# Altium PCB ActiveMarkerDeck.PcbDoc
Units mm, origin at the board's own origin, x right, y up, seen from the top; angles counter-clockwise.
Board outline 64 x 64 mm, 2 copper layers (F.Cu, B.Cu); 22 components, 12 nets, 118 pads, 6 vias.
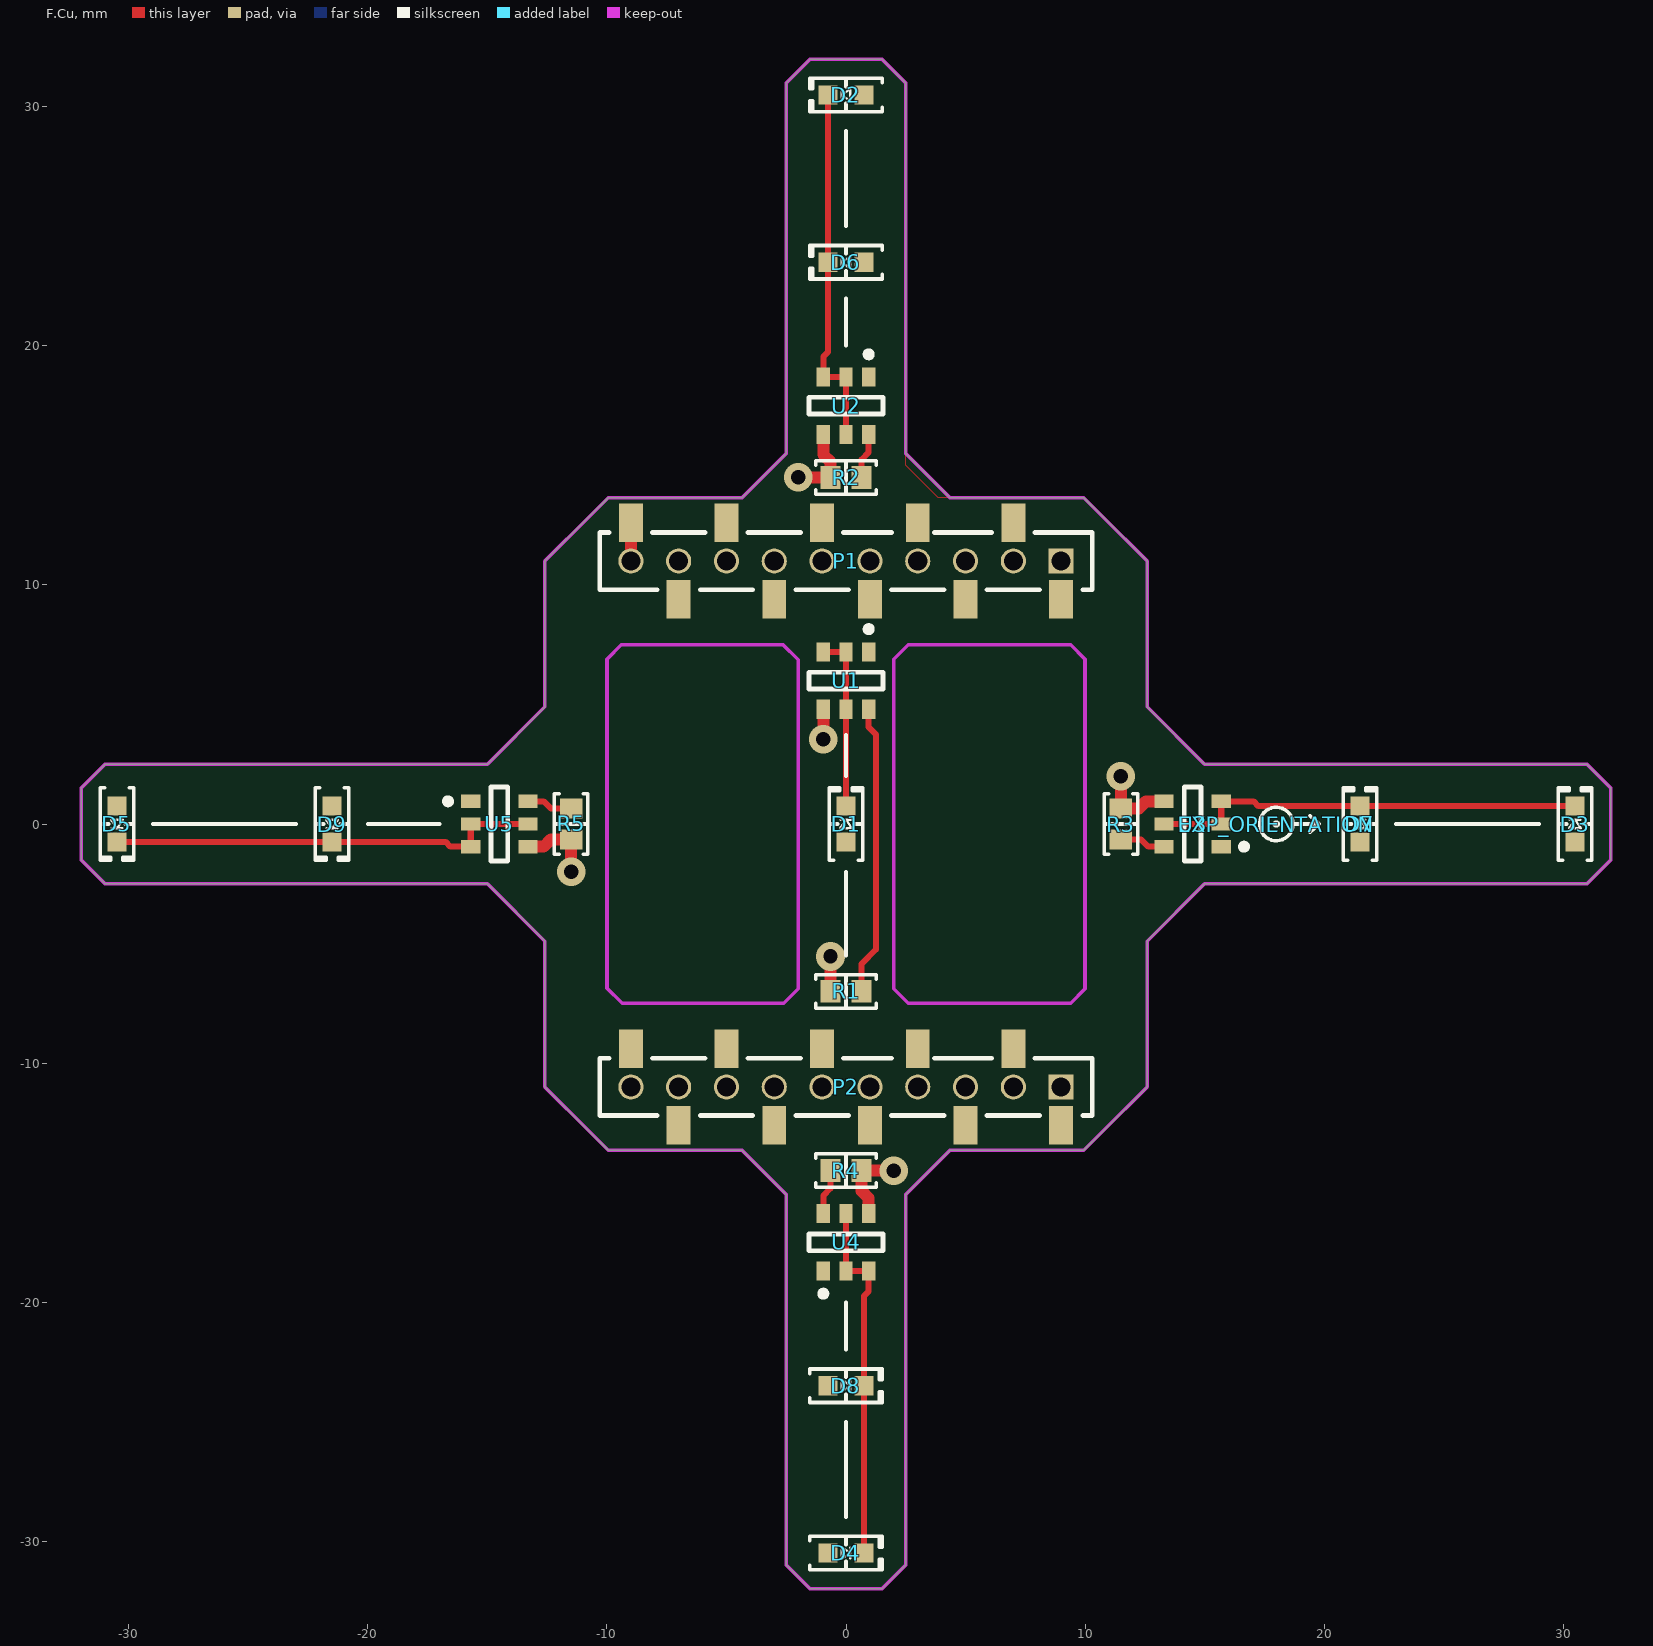
[diagram p0: F.Cu view]
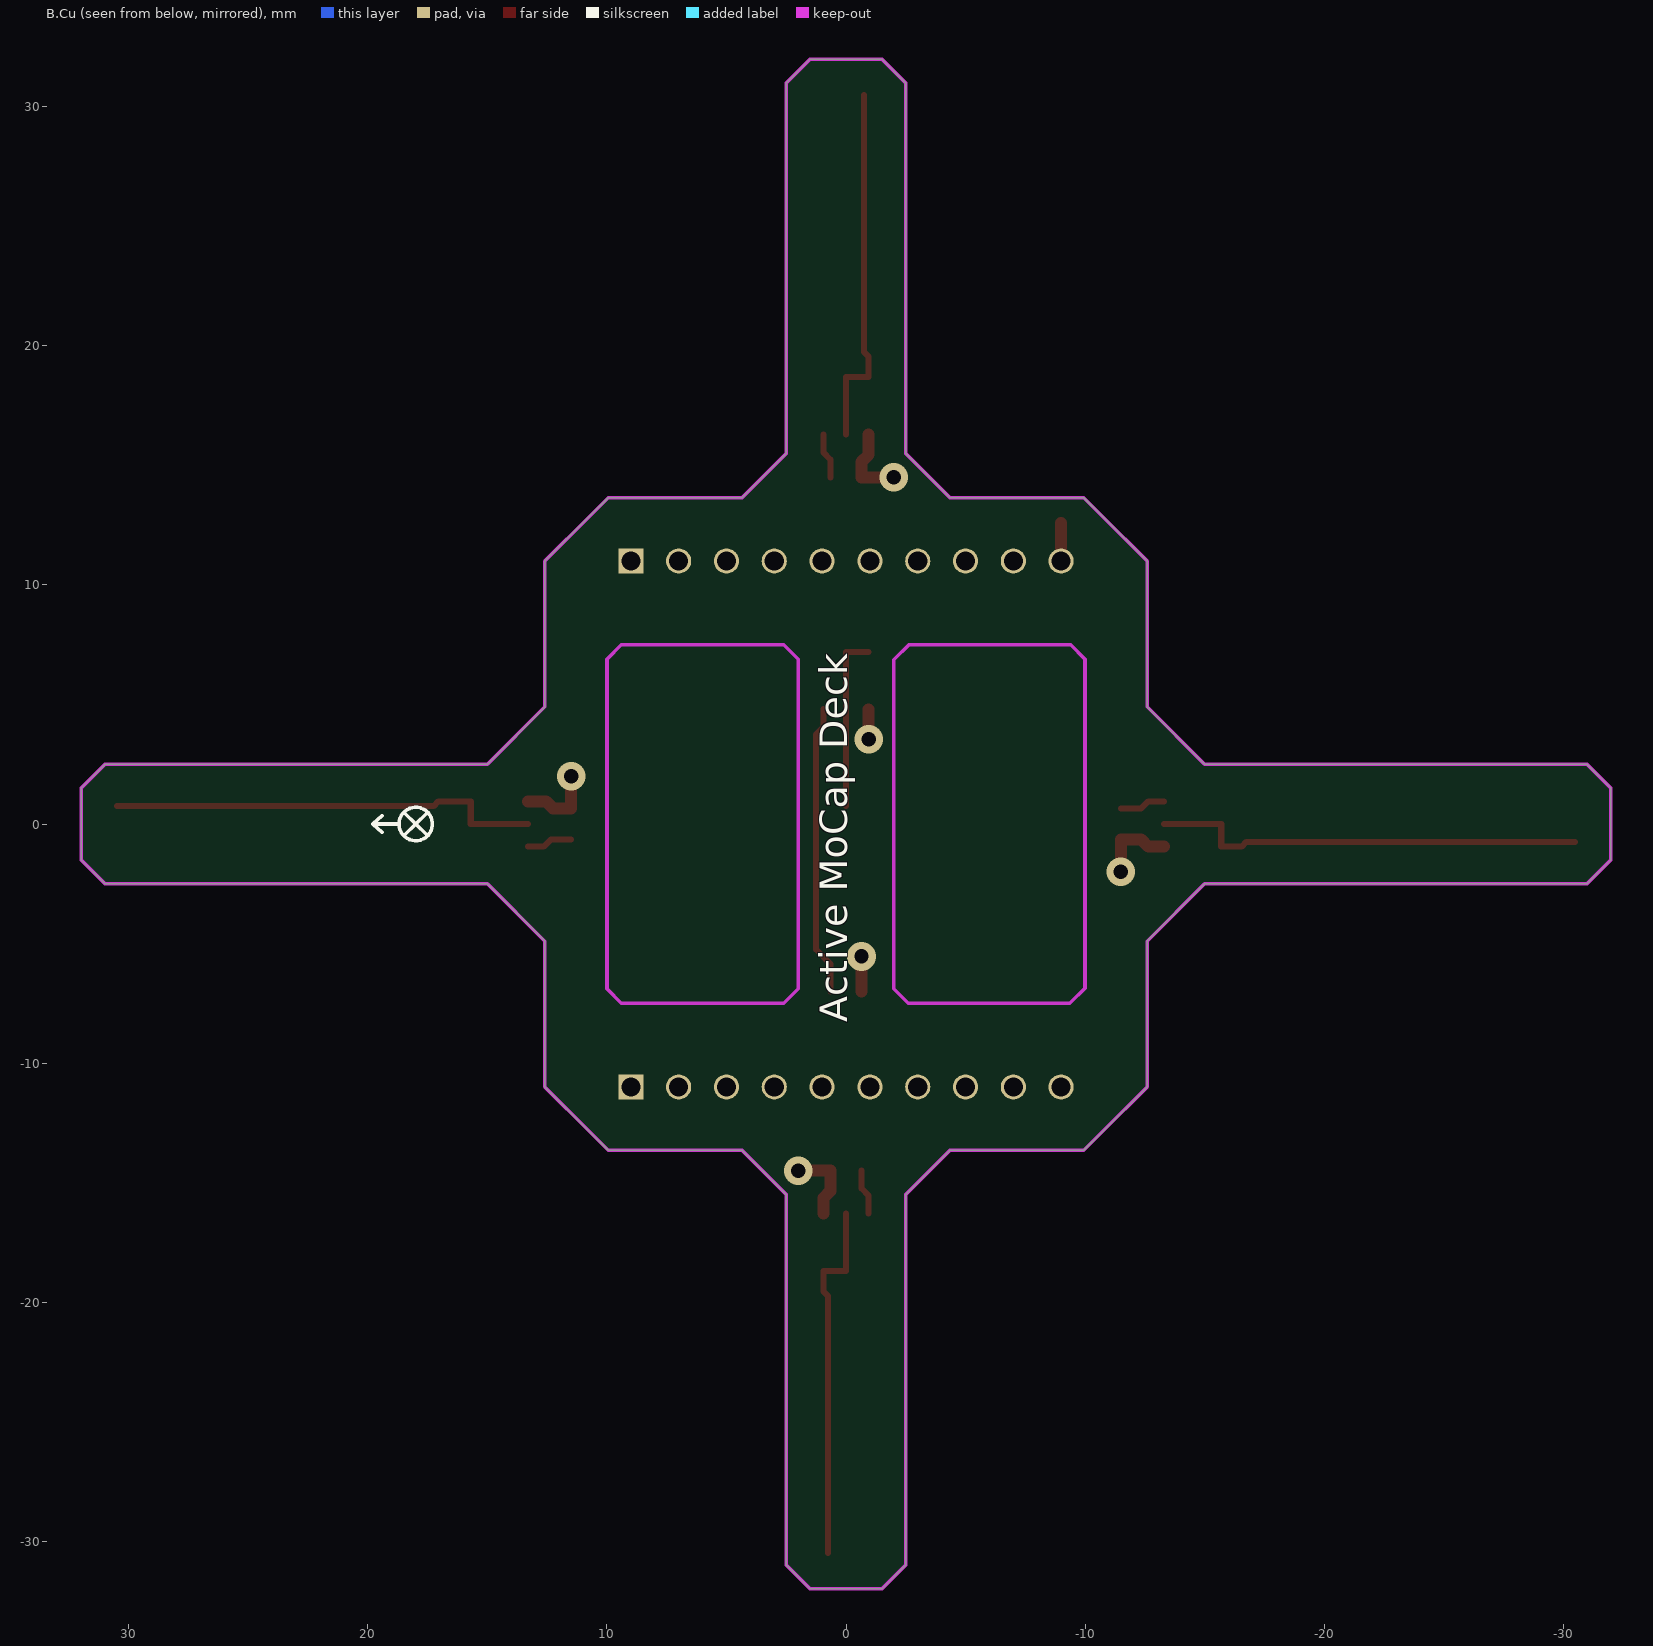
[diagram p1: B.Cu view, seen from below]

## Layer stack, top to bottom
F.Mask: solder mask 0.0102, Solder Resist, Dk 3.5
F.Cu: signal copper 0.0356
Dielectric 1: dielectric 0.32, FR-4, Dk 4.8
B.Cu: signal copper 0.0356
B.Mask: solder mask 0.0102, Solder Resist, Dk 3.5

## Board outline
-15,-2.5 -12.6,-4.9 -12.6,-11 -10.7,-12.9 -9.95,-13.65 -4.35,-13.65 -2.5,-15.5 -2.5,-31 -1.5,-32 1.5,-32 2.5,-31 2.5,-15.5 4.35,-13.65 9.95,-13.65 10.7,-12.9 12.6,-11 12.6,-4.9 15,-2.5 31,-2.5 32,-1.5 32,1.5 31,2.5 15,2.5 12.6,4.9 12.6,11 10.7,12.9 9.95,13.65 4.35,13.65 2.5,15.5 2.5,31 1.5,32 -1.5,32 -2.5,31 -2.5,15.5 -4.35,13.65 -9.95,13.65 -10.7,12.9 -12.6,11 -12.6,4.9 -15,2.5 -31,2.5 -32,1.5 -32,-1.5 -31,-2.5

## Design rules (kind name [scope] priority, off if disabled: settings)
AssemblyTestPointUsage [All] p0: scope1count=1 scope1_0_kind=Board scope1_0_value=Board scope2count=1 scope2_0_kind=Board scope2_0_value=Board commentlength=0
AssemblyTestpoint [All] p0: scope1count=1 scope1_0_kind=Board scope1_0_value=Board scope2count=1 scope2_0_kind=Board scope2_0_value=Board commentlength=0
Clearance [All] p0 off: scope1count=1 scope1_0_kind=Board scope1_0_value=Board scope2count=1 scope2_0_kind=Board scope2_0_value=Board commentlength=104 gap=0.2 // Protel DXP Scope 1 Expression Was: InNamedPolygon('GND_L02_P002') or InNamedPolygon('VCOM_L01_P005')
Clearance "Clearence 0.1524_NetClass" [All] p0: scope1count=1 scope1_0_kind=NetClass scope1_0_value=Default scope2count=1 scope2_0_kind=Board scope2_0_value=Board commentlength=0 gap=0.2
Clearance [InNamedPolygon('GND_L02_P002') or InNamedPolygon('VCOM_L01_P005')] p1: gap=0.2 ignorepadtopadclearanceinfootprint=FALSE
Clearance "Clearence 0.1524_NetClass" [InNetClass('Default')] p2: gap=0.2 ignorepadtopadclearanceinfootprint=FALSE
ComponentClearance [All] p0: scope1count=1 scope1_0_kind=Board scope1_0_value=Board scope2count=1 scope2_0_kind=Board scope2_0_value=Board commentlength=0 gap=0.254 collisioncheckmode=3
DiffPairsRouting [All] p0: scope1count=1 scope1_0_kind=Board scope1_0_value=Board scope2count=1 scope2_0_kind=Board scope2_0_value=Board commentlength=0
FabricationTestPointUsage [All] p0: scope1count=1 scope1_0_kind=Board scope1_0_value=Board scope2count=1 scope2_0_kind=Board scope2_0_value=Board commentlength=0 valid=0 allowmultiple=FALSE
FabricationTestpoint [All] p0: scope1count=1 scope1_0_kind=Board scope1_0_value=Board scope2count=1 scope2_0_kind=Board scope2_0_value=Board commentlength=0 side=3 testpointundercomponent=TRUE minsize=1.016 maxsize=2.54 preferedsize=1.524 minholesize=0 maxholesize=1.016 preferedholesize=0.813 testpointgrid=0.025
FanoutControl Fanout_BGA [All] p0 off: scope1count=1 scope1_0_kind=Board scope1_0_value=Board scope2count=1 scope2_0_kind=Board scope2_0_value=Board commentlength=69 // Protel DXP Scope 1 Expression Was: IsBGA   Fanout_BGA (Default Rule)
FanoutControl Fanout_LCC [All] p0 off: scope1count=1 scope1_0_kind=Board scope1_0_value=Board scope2count=1 scope2_0_kind=Board scope2_0_value=Board commentlength=69 // Protel DXP Scope 1 Expression Was: IsLCC   Fanout_LCC (Default Rule)
FanoutControl Fanout_SOIC [All] p0 off: scope1count=1 scope1_0_kind=Board scope1_0_value=Board scope2count=1 scope2_0_kind=Board scope2_0_value=Board commentlength=71 // Protel DXP Scope 1 Expression Was: IsSOIC   Fanout_SOIC (Default Rule)
FanoutControl Fanout_Small [All] p0 off: scope1count=1 scope1_0_kind=Board scope1_0_value=Board scope2count=1 scope2_0_kind=Board scope2_0_value=Board commentlength=84 // Protel DXP Scope 1 Expression Was: (CompPinCount < 5)   Fanout_Small (Default Rule)
FanoutControl Fanout_Default [All] p0: scope1count=1 scope1_0_kind=Board scope1_0_value=Board scope2count=1 scope2_0_kind=Board scope2_0_value=Board commentlength=30 // Fanout_Default (Default Rule)
Height [All] p0: scope1count=1 scope1_0_kind=Board scope1_0_value=Board scope2count=1 scope2_0_kind=Board scope2_0_value=Board commentlength=0
HoleSize "Hole Size (Default)" [All] p0: scope1count=1 scope1_0_kind=Board scope1_0_value=Board scope2count=1 scope2_0_kind=Board scope2_0_value=Board commentlength=0 absolutevalues=TRUE maxlimit=10 minlimit=0.381 maxpercent=80.000 minpercent=20.000
HoleSize "Hole Size (Default)" [All] p1: absolutevalues=TRUE maxlimit=10 minlimit=0.381 maxpercent=80.000 minpercent=20.000
HoleToHoleClearance [All] p0: scope1count=1 scope1_0_kind=Board scope1_0_value=Board scope2count=1 scope2_0_kind=Board scope2_0_value=Board commentlength=0
LayerPairs [All] p0: scope1count=1 scope1_0_kind=Board scope1_0_value=Board scope2count=1 scope2_0_kind=Board scope2_0_value=Board commentlength=0 enforce=TRUE
MinimumSolderMaskSliver [All] p0: scope1count=1 scope1_0_kind=Board scope1_0_value=Board scope2count=1 scope2_0_kind=Board scope2_0_value=Board commentlength=0
MinimumSolderMaskSliver [All] p1: minsoldermaskwidth=0
NetAntennae [All] p0: scope1count=1 scope1_0_kind=Board scope1_0_value=Board scope2count=1 scope2_0_kind=Board scope2_0_value=Board commentlength=0
PasteMaskExpansion [All] p0: scope1count=1 scope1_0_kind=Board scope1_0_value=Board scope2count=1 scope2_0_kind=Board scope2_0_value=Board commentlength=0 expansion=0
PlaneClearance [All] p0: scope1count=1 scope1_0_kind=Board scope1_0_value=Board scope2count=1 scope2_0_kind=Board scope2_0_value=Board commentlength=0 clearance=0.508
PlaneConnect [All] p0: scope1count=1 scope1_0_kind=Board scope1_0_value=Board scope2count=1 scope2_0_kind=Board scope2_0_value=Board commentlength=0 planeconnectstyle=Relief reliefexpansion=0.508 reliefentries=4 reliefconductorwidth=0.254 reliefairgap=0.254
PolygonConnect [All] p0: scope1count=1 scope1_0_kind=Board scope1_0_value=Board scope2count=1 scope2_0_kind=Board scope2_0_value=Board commentlength=0 connectstyle=Relief reliefconductorwidth=0.254 reliefentries=4 polygonreliefangle="90 Angle"
PolygonConnect [All] p1: connectstyle=Relief reliefconductorwidth=0.254 reliefentries=4 polygonreliefangle="90 Angle" airgapwidth=0.254
RoutingCorners [All] p0: scope1count=1 scope1_0_kind=Board scope1_0_value=Board scope2count=1 scope2_0_kind=Board scope2_0_value=Board commentlength=0 cornerstyle=45-Degree minsetback=2.54 maxsetback=2.54
RoutingLayers [All] p0: scope1count=1 scope1_0_kind=Board scope1_0_value=Board scope2count=1 scope2_0_kind=Board scope2_0_value=Board commentlength=0 top layer=Automatic bottom layer=Automatic
RoutingPriority [All] p0: scope1count=1 scope1_0_kind=Board scope1_0_value=Board scope2count=1 scope2_0_kind=Board scope2_0_value=Board commentlength=0
RoutingTopology [All] p0: scope1count=1 scope1_0_kind=Board scope1_0_value=Board scope2count=1 scope2_0_kind=Board scope2_0_value=Board commentlength=0 topology=Shortest
RoutingVias [All] p0: scope1count=1 scope1_0_kind=Board scope1_0_value=Board scope2count=1 scope2_0_kind=Board scope2_0_value=Board commentlength=0 holewidth=0.6 width=1.2 viastyle="Through Hole" minholewidth=0.6 minwidth=1.2 maxholewidth=0.6 maxwidth=1.2
RoutingVias [All] p1: holewidth=0.6 width=1.2 viastyle="Through Hole" minholewidth=0.6 minwidth=1.2 maxholewidth=0.6 maxwidth=1.2
ShortCircuit [All] p0: scope1count=1 scope1_0_kind=Board scope1_0_value=Board scope2count=1 scope2_0_kind=Board scope2_0_value=Board commentlength=0 allowed=FALSE
SilkToBoardRegionClearance [All] p0: scope1count=1 scope1_0_kind=Board scope1_0_value=Board scope2count=1 scope2_0_kind=Board scope2_0_value=Board commentlength=0
SilkToSilkClearance [All] p0: scope1count=1 scope1_0_kind=Board scope1_0_value=Board scope2count=1 scope2_0_kind=Board scope2_0_value=Board commentlength=0
SilkToSilkClearance [All] p1: silktosilkclearance=0
SilkToSolderMaskClearance [All] p0 off: scope1count=1 scope1_0_kind=Board scope1_0_value=Board scope2count=1 scope2_0_kind=Board scope2_0_value=Board commentlength=44 // Protel DXP Scope 1 Expression Was: IsPad
SilkToSolderMaskClearance [IsPad] p1: minsilkscreentomaskgap=0 clearancetoexposedcopper=TRUE
SolderMaskExpansion [All] p0: scope1count=1 scope1_0_kind=Board scope1_0_value=Board scope2count=1 scope2_0_kind=Board scope2_0_value=Board commentlength=0 expansion=0.102
SolderMaskExpansion [All] p1: expansion=0.102 istentingtop=FALSE
UnRoutedNet [All] p0: scope1count=1 scope1_0_kind=Board scope1_0_value=Board scope2count=1 scope2_0_kind=Board scope2_0_value=Board commentlength=0
UnpouredPolygon [All] p0: scope1count=1 scope1_0_kind=Board scope1_0_value=Board scope2count=1 scope2_0_kind=Board scope2_0_value=Board commentlength=0
Width [All] p0: scope1count=1 scope1_0_kind=Board scope1_0_value=Board scope2count=1 scope2_0_kind=Board scope2_0_value=Board commentlength=0 maxlimit=0.5 minlimit=0.254 preferedwidth=0.254
Width [All] p1: maxlimit=0.5 minlimit=0.254 preferedwidth=0.254
26 further rules are at their usual default settings.

## Components (designator, comment, footprint, x,y, rotation, side; value= is the part's Value field where it differs from the comment)
D1 "850nm" "LED 0603_1608 RED" 0,0 r90 top
D2 "850nm" "LED 0603_1608 RED" 0,30.5 r180 top
D3 "850nm" "LED 0603_1608 RED" 30.5,0 r90 top
D4 "850nm" "LED 0603_1608 RED" 0,-30.5 r0 top
D5 "850nm" "LED 0603_1608 RED" -30.5,0 r270 top
D6 "850nm" "LED 0603_1608 RED" 0,23.5 r180 top
D7 "850nm" "LED 0603_1608 RED" 21.5,0 r90 top
D8 "850nm" "LED 0603_1608 RED" 0,-23.5 r0 top
D9 "850nm" "LED 0603_1608 RED" -21.5,0 r270 top
EXP_ORIENTATION "" EXP_ORIENTATION 18,0 r0 top
P1 "CF_EXP_LEFT" BF090-10-X-B2 0,11 r180 top
P2 "CF_EXP_RIGHT" BF090-10-X-B2 0,-11 r180 top
R1 "20 Ohms" "RES 0603_1608" 0,-7 r180 top
R2 "20 Ohms" "RES 0603_1608" 0,14.5 r180 top
R3 "20 Ohms" "RES 0603_1608" 11.5,0 r90 top
R4 "20 Ohms" "RES 0603_1608" 0,-14.5 r0 top
R5 "20 Ohms" "RES 0603_1608" -11.5,0 r270 top
U1 "BCR421UW6Q-7" FP-SOT26_SC74R-MFG 0,6 r270 top
U2 "BCR421UW6Q-7" FP-SOT26_SC74R-MFG 0,17.5 r270 top
U3 "BCR421UW6Q-7" FP-SOT26_SC74R-MFG 14.5,0 r180 top
U4 "BCR421UW6Q-7" FP-SOT26_SC74R-MFG 0,-17.5 r90 top
U5 "BCR421UW6Q-7" FP-SOT26_SC74R-MFG -14.5,0 r0 top

## Footprints (in the part's own frame and the unit in brackets; to place one, negate y for a bottom-side part, rotate by r counter-clockwise, add the part's x,y. Pads: shape width x height; smd on the part's side, far side on the other; paste and mask are expansions set on the pad)
BF090-10-X-B2 [mm]
  round 1.05 smd paste-1.05 mask+0: 1(-9,0) 2(-7,0) 3(-5,0) 4(-3,0) 5(-1,0) 6(1,0) 7(3,0) 8(5,0) 9(7,0) 10(9,0)
  rect 1.05x1.05 hole 0.8 paste+0 mask+0: 1(-9,0)
  rect 1x1.6 smd paste-0.03 mask+0: 1(-9,1.6) 2(-7,-1.6) 3(-5,1.6) 4(-3,-1.6) 5(-1,1.6) 6(1,-1.6) 7(3,1.6) 8(5,-1.6) 9(7,1.6) 10(9,-1.6)
  round 1.05 hole 0.8 paste+0 mask+0: 2(-7,0) 3(-5,0) 4(-3,0) 5(-1,0) 6(1,0) 7(3,0) 8(5,0) 9(7,0) 10(9,0)
  silkscreen extent -10.3,-1.2 10.3,1.2
EXP_ORIENTATION [mm]
  silkscreen extent -0.7,-0.7 1.8,0.7
FP-SOT26_SC74R-MFG [mm]
  rect 0.8x0.55 smd paste+0 mask+0: 1(-1.2,0.95) 2(-1.2,0) 3(-1.2,-0.95) 4(1.2,-0.95) 5(1.2,0) 6(1.2,0.95)
  silkscreen extent -2.27,-1.55 0.35,1.55
"LED 0603_1608 RED" [mm] "Chip Diode, 2-Leads, Body 1.60x0.80mm, IPC Medium Density"
  rect 0.8x0.8 smd: 1(-0.75,0) 2(0.75,0)
  silkscreen extent -1.52,-0.7 1.52,0.7
"RES 0603_1608" [mm] "Chip Resistor, 2-Leads, Body 1.60x0.80mm, IPC Medium Density"
  rect 0.85x0.95 smd: 1(-0.65,0) 2(0.65,0)
  silkscreen extent -1.27,-0.7 1.27,0.7

## Part data
D1 D2 D3 D4 D5 D6 D7 D8 D9: library part CL-196HR-CD-T, "LED RED SMD"
EXP_ORIENTATION: library part EXP_ORIENTATION
R1 R2 R3 R4 R5: library part RC0603JR-0720RL, "RES 20 OHM 5% 1/10W 0603"
U1 U2 U3 U4 U5: library part CMP-12753-000005-1, "TRANSISTOR LED DRIVER SOT26 T&R"

## Via types
v1: diameter 1.2, hole 0.6, F.Cu to B.Cu, tented both sides, 6 vias

## Nets (pads, with @x,y where several pads share a name; then routed paths per layer and width w, separated by ;. In a path a pad name is that pad's centre, name@x,y a point inside that pad or via, vN(x,y) a via of type N, cw(c..) or ccw(c..) an arc to the next point about the centre after c; other vN are vias at no path point)
GND: P1.10 R1.2 R2.2 R3.2 R4.2 R5.2 U1.4 U2.4 U3.4 U4.4 U5.4 | length 17.4
  F.Cu w0.5: U5.4 -12.65,-0.95 -12.35,-0.65 R5.2 v1(-11.5,-2) ; P1.10@-9,11 P1.10@-9,12.6 ; v1(-2,14.5) R2.2 -0.65,15.15 -0.95,15.45 U2.4 ; v1(-0.95,3.55) U1.4 ; R1.2 v1(-0.65,-5.539) ; U4.4 0.95,-15.65 0.65,-15.35 R4.2 v1(2,-14.5) ; v1(11.5,2) R3.2 12.25,0.65 12.55,0.95 U3.4
NetD1_2: D1.2 U1.2 U1.3 U1.5 | length 7.4
  F.Cu w0.254: U1.3 U1.2 U1.5 D1.2
NetD2_2: D2.2 D6.2 U2.2 U2.3 U2.5 | length 15.2
  F.Cu w0.254: D2.2 -0.75,19.75 -0.95,19.55 U2.3 U2.2 U2.5
NetD3_2: D3.2 D7.2 U3.2 U3.3 U3.5 | length 18.2
  F.Cu w0.254: U3.5 U3.2 U3.3 17.05,0.95 17.25,0.75 23.5,0.75 D3.2
NetD4_2: D4.2 D8.2 U4.2 U4.3 U4.5 | length 15.2
  F.Cu w0.254: U4.5 U4.2 U4.3 0.95,-19.55 0.75,-19.75 D4.2
NetD5_2: D5.2 D9.2 U5.2 U5.3 U5.5 | length 18.2
  F.Cu w0.254: D5.2 D9.2 -16.75,-0.75 -16.55,-0.95 U5.3 U5.2 U5.5
NetR1_1: R1.1 U1.6 | length 12.2
  F.Cu w0.254: R1.1 0.65,-5.85 1.25,-5.25 1.25,3.75 0.95,4.05 U1.6
NetR2_1: R2.1 U2.6 | length 1.9
  F.Cu w0.254: R2.1 0.65,15.25 0.95,15.55 U2.6
NetR3_1: R3.1 U3.6 | length 1.9
  F.Cu w0.254: R3.1 12.35,-0.65 12.65,-0.95 U3.6
NetR4_1: R4.1 U4.6 | length 1.9
  F.Cu w0.254: U4.6 -0.95,-15.55 -0.65,-15.25 R4.1
NetR5_1: R5.1 U5.6 | length 1.9
  F.Cu w0.254: U5.6 -12.65,0.95 -12.35,0.65 R5.1
VCOM: D1.1 D2.1 D3.1 D4.1 D5.1 D6.1 D7.1 D8.1 D9.1 P2.9 U1.1 U2.1 U3.1 U4.1 U5.1
pads on no net: P1.1 P1.2 P1.3 P1.4 P1.5 P1.6 P1.7 P1.8 P1.9 P2.1 P2.2 P2.3 P2.4 P2.5 P2.6 P2.7 P2.8 P2.10

## Polygon pours and split planes (outlines as drawn)
GND on B.Cu "GND_L02_P002" (solid, pour order 2): -1.5,32 -2.5,31 -2.5,15.5 -4.35,13.65 -9.95,13.65 -12.6,11 -12.6,4.9 -15,2.5 -31,2.5 -32,1.5 -32,-1.5 -31,-2.5 -15,-2.5 -12.6,-4.9 -12.6,-11 -9.95,-13.65 -4.35,-13.65 -2.5,-15.5 -2.5,-31 -1.5,-32 1.5,-32 2.5,-31 2.5,-15.5 4.35,-13.65 9.95,-13.65 12.6,-11 12.6,-4.9 15,-2.5 31,-2.5 32,-1.5 32,1.5 31,2.5 15,2.5 12.6,4.9 12.6,11 9.95,13.65 4.35,13.65 2.5,15.5 2.5,31 1.5,32
VCOM on F.Cu "VCOM_L01_P005" (solid, pour order 5): -1.5,32 -2.5,31 -2.5,15.5 -4.35,13.65 -9.95,13.65 -12.6,11 -12.6,4.9 -15,2.5 -31,2.5 -32,1.5 -32,-1.5 -31,-2.5 -15,-2.5 -12.6,-4.9 -12.6,-11 -9.95,-13.65 -4.35,-13.65 -2.5,-15.5 -2.5,-31 -1.5,-32 1.5,-32 2.5,-31 2.5,-15.5 4.35,-13.65 9.95,-13.65 12.6,-11 12.6,-4.9 15,-2.5 31,-2.5 32,-1.5 32,1.5 31,2.5 15,2.5 12.6,4.9 12.6,11 9.95,13.65 3.85,13.65 2.5,15 2.5,31 1.5,32

## Keep-outs
Edge.Cuts:
  lines w0.15: -12.6,-11 -12.6,-4.9 -15,-2.5 -31,-2.5 -32,-1.5 -32,1.5 -31,2.5 -15,2.5 -12.6,4.9 -12.6,11 ; -12.6,-11 -10.7,-12.9 ; -12.6,-11 -10.7,-12.9 ; -12.6,11 -10.7,12.9 ; -12.6,11 -10.7,12.9 ; -10.7,-12.9 -9.95,-13.65 ; -10.7,-12.9 -9.95,-13.65 ; -10.7,12.9 -9.95,13.65 ; -10.7,12.9 -9.95,13.65 ; -9.95,-13.65 -4.35,-13.65 -2.5,-15.5 -2.5,-31 -1.5,-32 1.5,-32 ; -9.95,13.65 -4.35,13.65 -2.5,15.5 -2.5,31 -1.5,32 1.5,32 2.5,31 2.5,15.5 4.35,13.65 9.95,13.65 ; 1.5,-32 2.5,-31 2.5,-15.5 4.35,-13.65 9.95,-13.65 ; 1.5,-32 1.5,-32 ; 9.95,-13.65 10.7,-12.9 ; 9.95,-13.65 10.7,-12.9 ; 9.95,13.65 10.7,12.9 ; 9.95,13.65 10.7,12.9 ; 10.7,-12.9 12.6,-11 ; 10.7,-12.9 12.6,-11 ; 10.7,12.9 12.6,11 ; 10.7,12.9 12.6,11 ; 12.6,-11 12.6,-4.9 15,-2.5 31,-2.5 32,-1.5 32,1.5 31,2.5 15,2.5 12.6,4.9 12.6,11 ; -10,-6.866 -10,6.897 -9.397,7.5 -2.634,7.5 -2,6.866 -2,-6.897 -2.603,-7.5 -9.366,-7.5 -10,-6.866 ; 2,-6.897 2,6.897 2.603,7.5 9.397,7.5 10,6.897 10,-6.897 9.397,-7.5 2.603,-7.5 2,-6.897

## Silkscreen, mask and mechanical layers (free items; w line width, h text height)
F.SilkS:
  lines w0.15: -29,0 -23,0 ; -20,0 -17,0 ; 0,-29 0,-25 ; 0,-22 0,-20 ; 0,-5.5 0,-2 ; 0,2 0,3.725 ; 0,20 0,22 ; 0,25 0,29 ; 23,0 29,0
B.SilkS:
  text "Active MoCap Deck" at -0.448,-8.3 h2 r270
Eco1.User:
  drawing of 1840 lines, arcs and shapes, not listed
  text "Crazyflie 2.0" at 22.235,21.695 h1 r45
  text "Bitcraze" at -21.167,21.571 h1 r135
  text "M2" at 13.826,13.491 h0.8 r135
  text "M1" at -13.491,13.196 h0.8 r45
  text "SWD / BOTTOM" at -10.226,2.084 h1 r90
  text "uUSB / TOP" at -19.376,1.84 h1 r90
  text "ANT" at 15.258,-0.179 h1
  text "BAT" at -15.121,-5.507 h1 r90
  text "BTN" at 13.674,-7.328 h1 r105
  text "M4" at -13.172,-13.512 h0.8 r135
  text "M3" at 13.497,-13.825 h0.8 r45
  text "Bitcraze" at 22.833,-22.429 h1 r135
  text "Crazyflie 2.0" at -23.765,-24.305 h1 r45

## Text inside footprints (layer, text, board x,y; h text height)
U4: Top 3D Body "VAL**" at 17.311,-3.683 h1